# EAGLE board copy (EAGLE 4.16)
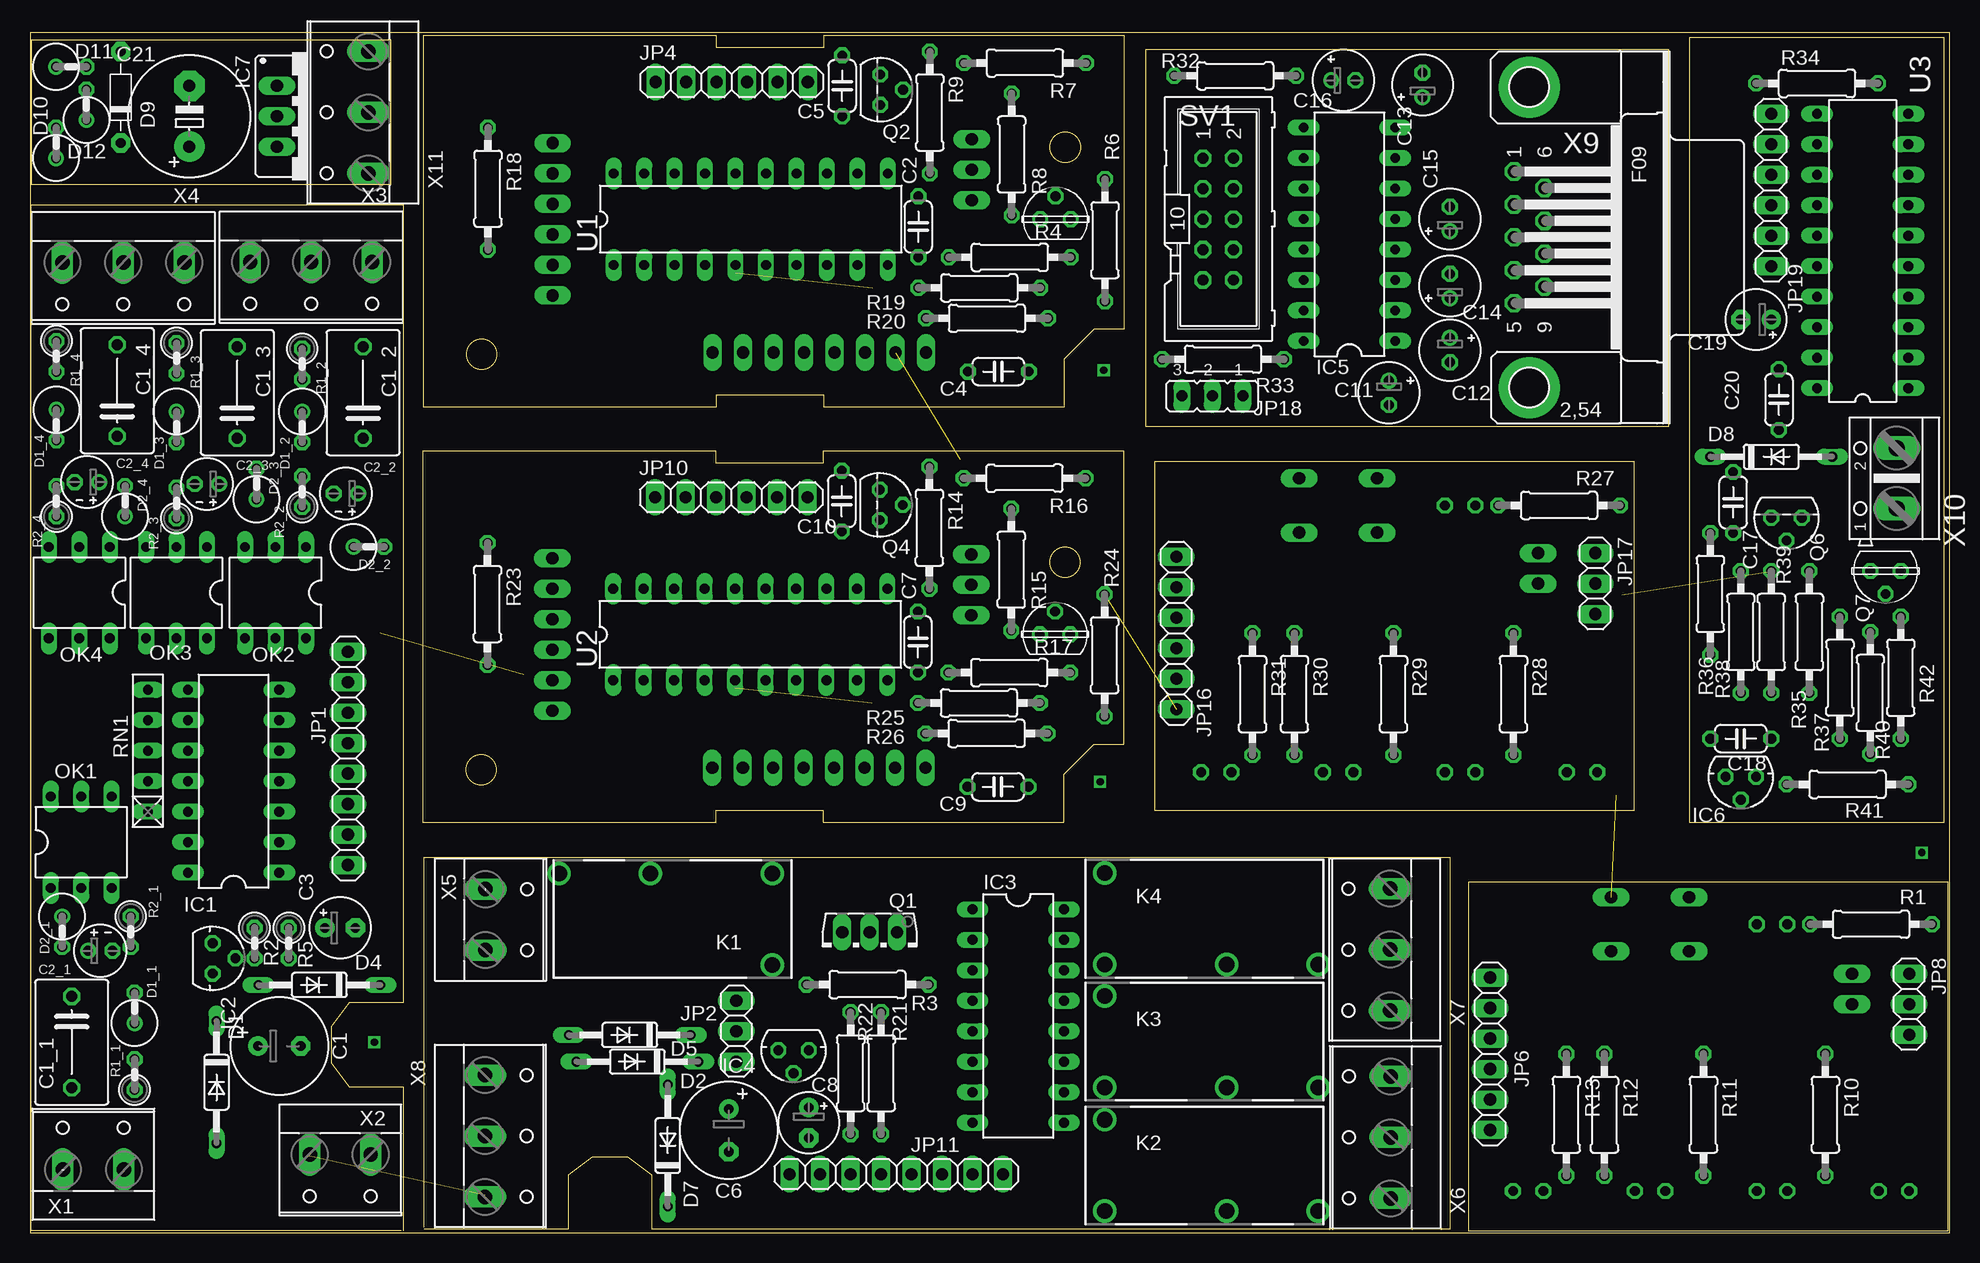
[diagram p0: board, top side]
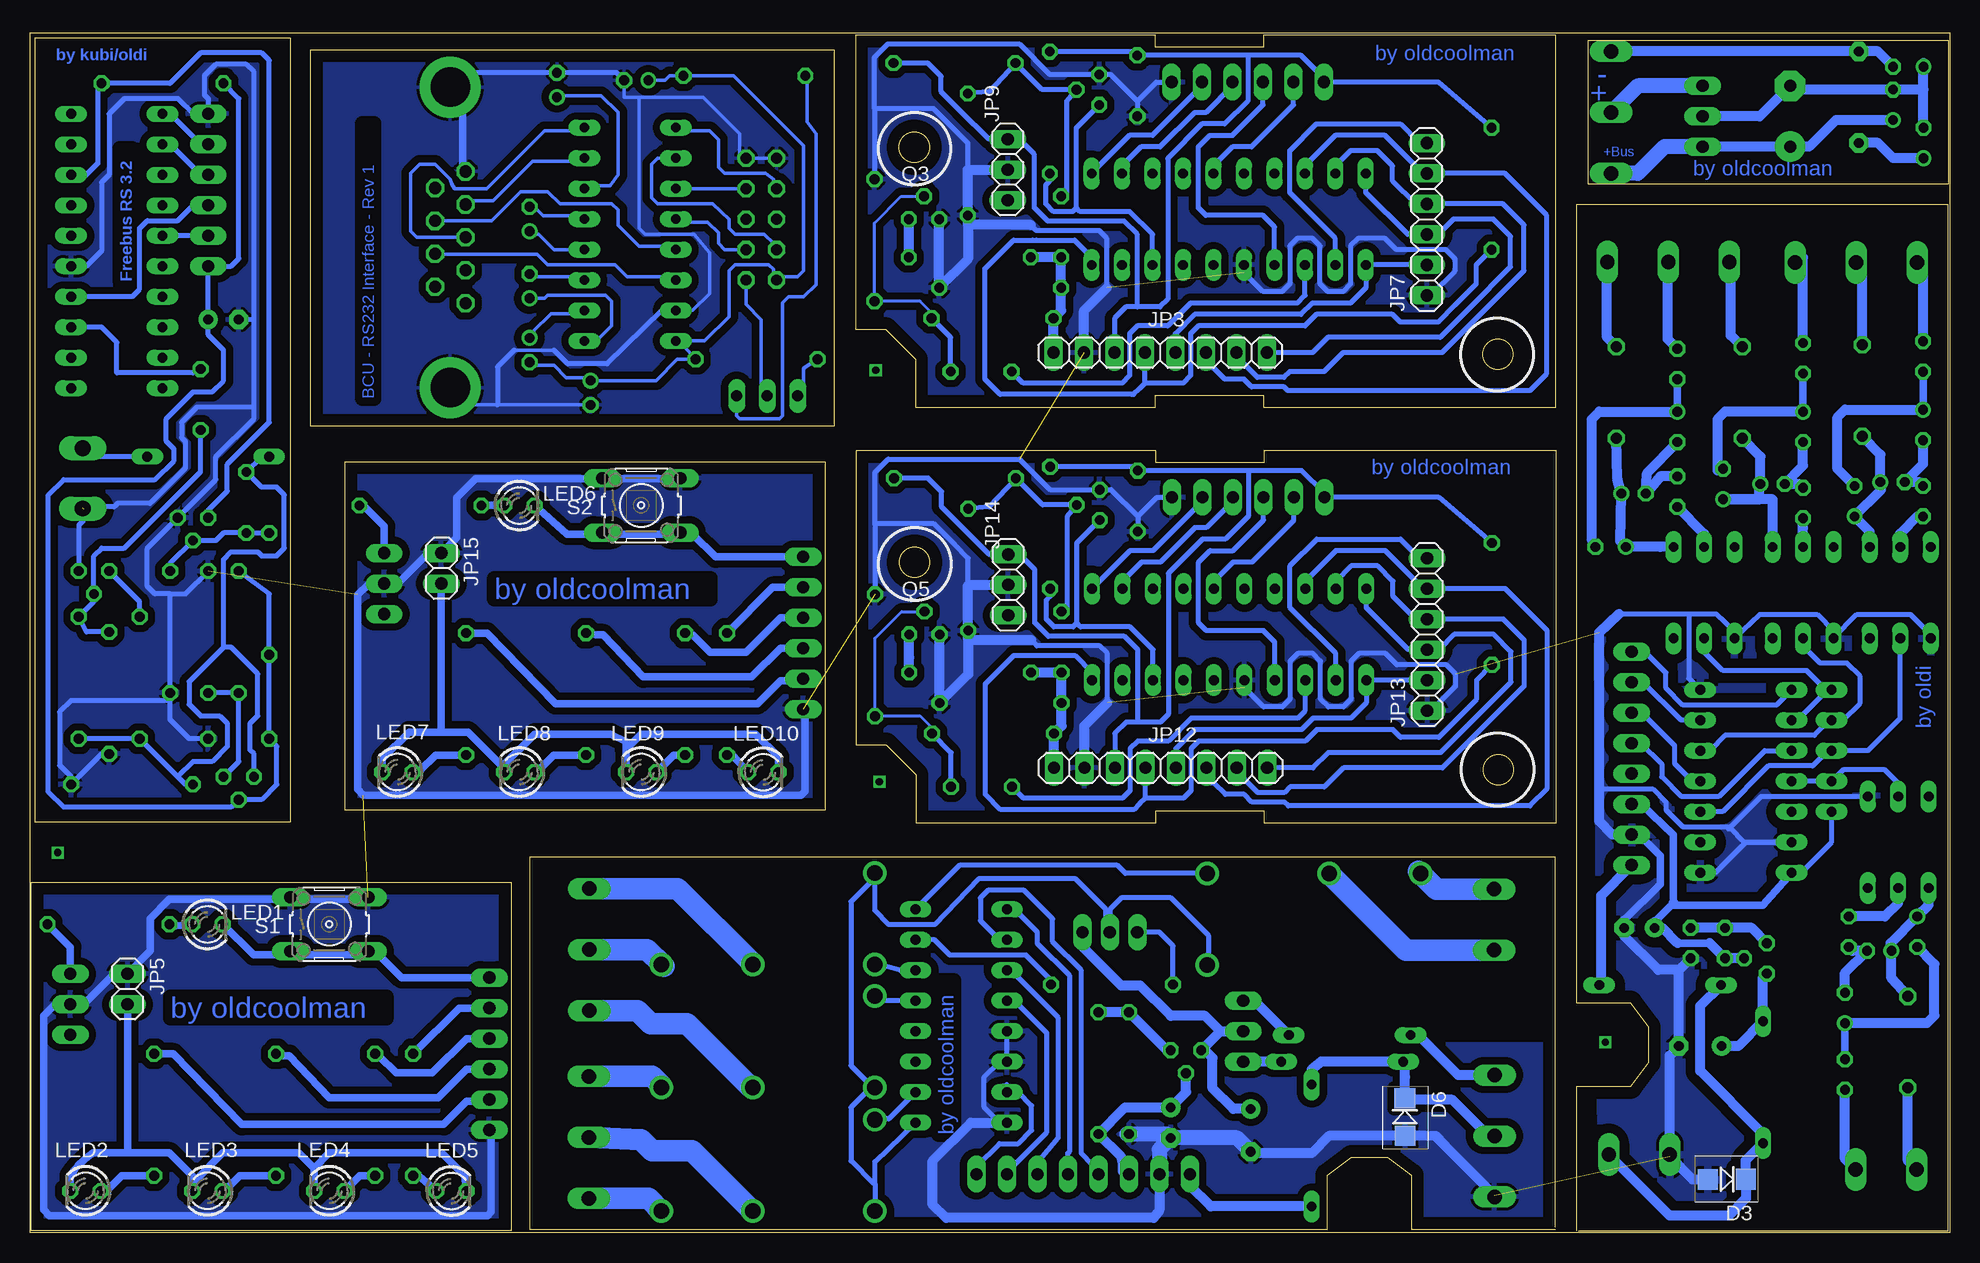
[diagram p1: board, bottom side, seen from below]

Size 160 x 100 mm. Coordinates in mm from the lower left corner, seen from the top.
Outline: 30.94,0.19 0.1,0.19 0.1,85.68 31.1,85.68 31.1,19.18 26.6,19.18 26.59,19.17 25.1,17.17 25.1,14.19 25.1,14.19 26.61,12.18 31.1,12.18 31.1,0.18
Outline: 91.18,75.3 88.68,75.3 86.18,72.8
Outline: 86.18,72.8 86.18,68.8 66.18,68.8 66.18,69.8
Outline: 66.18,69.8 57.18,69.8 57.18,68.8 32.81,68.8 32.81,99.8 57.18,99.8 57.18,98.8 66.18,98.8 66.18,99.8
Outline: 66.18,99.8 91.18,99.8 91.18,75.3
Outline: 159.9,0.18 159.9,29.22
Outline: 159.9,29.22 119.9,29.22
Outline: 119.9,29.22 119.9,0.18
Outline: 119.9,0.18 159.9,0.18
Outline: 32.85,0.46 32.85,31.3 118.35,31.3 118.35,0.3 51.85,0.3 51.85,4.8 51.84,4.81 49.83,6.3 46.85,6.3 46.85,6.3 44.84,4.79 44.84,0.3 32.85,0.3
Outline: 91.14,40.7 88.64,40.7 86.14,38.2
Outline: 86.14,38.2 86.14,34.2 66.14,34.2 66.14,35.2
Outline: 66.14,35.2 57.15,35.2 57.15,34.2 32.78,34.2 32.78,65.2 57.14,65.2 57.14,64.2 66.14,64.2 66.14,65.2
Outline: 66.14,65.2 91.15,65.2 91.15,40.7
Outline: 133.74,35.23 133.74,64.28
Outline: 133.74,64.28 93.74,64.28
Outline: 93.74,64.28 93.74,35.24
Outline: 93.74,35.24 133.74,35.24
Outline: 0,0 160,0 160,100 0,100 0,0
Outline: 93,67.22 136.61,67.22 136.61,98.58 93,98.58 93,67.22
Outline: 159.58,99.61 138.32,99.61 138.32,34.21 159.58,34.21 159.58,99.61
Outline: 30.11,99.41 0.11,99.41 0.11,87.41 30.11,87.41 30.11,99.41
Outline: circle at 86.3,90.48 radius 1.26
Outline: circle at 37.63,73.21 radius 1.26
Outline: circle at 86.26,55.88 radius 1.26
Outline: circle at 37.59,38.61 radius 1.26
Copper layers (1*16): Top 0.035mm / dielectric 1.5mm / Bottom 0.035mm
Design rules "default": minimum track width 10mil, minimum drill 24mil, track to track 8mil, track to pad 8mil, pad to pad 8mil, via to via 8mil, smd to smd 8mil, copper to edge 40mil, drill to drill 8mil, minimum pad ring 10mil, minimum via ring 8mil, stop-mask expansion 4mil, vias tented up to drill 0mil, thermal gap 10mil

## Footprints (pad centres in the part's own frame; a part is rotated, then mirrored left to right if it is on the bottom)
E3,5-8 = drill 0.813 pad 1.6 round: + -1.778,0 | drill 0.813 pad 1.6 octagon: - 1.778,0
C075-063X106 = drill 0.914 octagon: 1 -3.81,0; 2 3.81,0
C050-024X044 = drill 0.813 octagon: 1 -2.54,0; 2 2.54,0
E2-4 = drill 0.813 pad 1.27 round: + -1.016,0 | drill 0.813 pad 1.27 octagon: - 1.016,0
E2,5-5 = drill 0.813 pad 1.6 round: + -1.27,0 | drill 0.813 pad 1.6 octagon: - 1.27,0
E2-5 = drill 0.813 pad 1.27 round: + -1.016,0 | drill 0.813 pad 1.27 octagon: - 1.016,0
E5-10,5 = drill 1.016 pad 2.54 round: + -2.54,0 | drill 1.016 pad 2.54 octagon: - 2.54,0
DO35-10 = drill 0.813 long: A 5.08,0; C -5.08,0
RAD2,5 = drill 0.813 octagon: A 1.27,0 | drill 0.813 round: C -1.27,0
SMA = smd 1.67 x 1.73: 1 -1.576,0; 2 1.58,0.014
D-7,5 = drill 0.813 pad 1.6 octagon: 1 -3.81,0; 2 3.81,0
DIL14 = drill 0.813 long: 1 -7.62,-3.81; 2 -5.08,-3.81; 3 -2.54,-3.81; 4 0,-3.81; 5 2.54,-3.81; 6 5.08,-3.81; 7 7.62,-3.81; 8 7.62,3.81; 9 5.08,3.81; 10 2.54,3.81; 11 0,3.81; 12 -2.54,3.81; 13 -5.08,3.81; 14 -7.62,3.81
317L = drill 0.813 octagon: 1 -1.27,0; 2 0,1.905; 3 1.27,0
DIL16 = drill 0.813 long: 1 -8.89,-3.81; 2 -6.35,-3.81; 3 -3.81,-3.81; 4 -1.27,-3.81; 5 1.27,-3.81; 6 3.81,-3.81; 7 6.35,-3.81; 8 8.89,-3.81; 9 8.89,3.81; 10 6.35,3.81; 11 3.81,3.81; 12 1.27,3.81; 13 -1.27,3.81; 14 -3.81,3.81; 15 -6.35,3.81; 16 -8.89,3.81
78XXS = drill 1.016 long: GND 0,-2.54; IN -2.54,-2.54; OUT 2.54,-2.54
1X08 = drill 1.016 long: 1 -8.89,0; 2 -6.35,0; 3 -3.81,0; 4 -1.27,0; 5 1.27,0; 6 3.81,0; 7 6.35,0; 8 8.89,0
1X03 = drill 1.016 long: 1 -2.54,0; 2 0,0; 3 2.54,0
1X06 = drill 1.016 long: 1 -6.35,0; 2 -3.81,0; 3 -1.27,0; 4 1.27,0; 5 3.81,0; 6 6.35,0
1X02 = drill 1.016 long: 1 -1.27,0; 2 1.27,0
JP2 = drill 0.914 long: 1 -2.54,0; 2 0,0; 3 2.54,0
RE-SCHRACK = drill 1.3 round: 11 8.89,-3.81; 14 1.27,-3.81; A1 -8.89,-3.81; A2 -8.89,3.81
LED3MM = drill 0.813 octagon: A -1.27,0; K 1.27,0
DIL06 = drill 0.813 long: 1 -2.54,-3.81; 2 0,-3.81; 3 2.54,-3.81; 4 2.54,3.81; 5 0,3.81; 6 -2.54,3.81
TO126AV = drill 1.016 long: B 2.286,-1.27; C 0,-1.27; E -2.286,-1.27
TO92 = drill 0.813 octagon: 1 1.27,0; 2 0,1.905; 3 -1.27,0
TO237 = drill 0.813 octagon: 1 1.27,0; 2 0,1.905; 3 -1.27,0
0207/10 = drill 0.813 octagon: 1 -5.08,0; 2 5.08,0
0207/2V = drill 0.813 octagon: 1 -1.27,0; 2 1.27,0
RN-5 = drill 0.813 long: 1 -5.08,0; 2 -2.54,0; 3 0,0; 4 2.54,0; 5 5.08,0
B3F-10XX = drill 1.016 long: 1 -3.251,2.261; 2 3.251,2.261; 3 -3.251,-2.261; 4 3.251,-2.261
ML10 = drill 0.914 octagon: 1 -5.08,-1.27; 2 -5.08,1.27; 3 -2.54,-1.27; 4 -2.54,1.27; 5 0,-1.27; 6 0,1.27; 7 2.54,-1.27; 8 2.54,1.27; 9 5.08,-1.27; 10 5.08,1.27
DIL20 = drill 0.813 long: 1 -11.43,-3.81; 2 -8.89,-3.81; 3 -6.35,-3.81; 4 -3.81,-3.81; 5 -1.27,-3.81; 6 1.27,-3.81; 7 3.81,-3.81; 8 6.35,-3.81; 9 8.89,-3.81; 10 11.43,-3.81; 11 11.43,3.81; 12 8.89,3.81; 13 6.35,3.81; 14 3.81,3.81; 15 1.27,3.81; 16 -1.27,3.81; 17 -3.81,3.81; 18 -6.35,3.81; 19 -8.89,3.81; 20 -11.43,3.81
W237-132 = drill 1.194 long: 1 -2.54,-0.635; 2 2.54,-0.635
W237-3E = drill 1.194 long: 1 -5.08,-0.635; 2 0,-0.635; 3 5.08,-0.635
F09HP = drill 1.016 octagon: 1 -5.486,-1.27; 2 -2.743,-1.27; 3 0,-1.27; 4 2.743,-1.27; 5 5.486,-1.27; 6 -4.115,1.27; 7 -1.372,1.27; 8 1.372,1.27; 9 4.115,1.27 | drill 3.302 pad 5.08 round: G1 -12.522,0; G2 12.522,0
AK500/2 = drill 1.321 long: 1 -2.515,0; 2 2.515,0

## Placement (x,y rotation side)
C1  10µ  [E3,5-8]  20.78,15.58 0 top
C1_1  47nF  [C075-063X106]  3.48,15.9 270 top
C1_2  47nF  [C075-063X106]  27.77,70.03 90 top
C1_3  47nF  [C075-063X106]  17.29,70.03 90 top
C1_4  47nF  [C075-063X106]  7.29,70.19 90 top
C2  100n  [C050-024X044]  74.05,83.84 90 top
C2_1  [E2-4]  5.86,23.52 0 top
C2_2  [E2-4]  26.34,61.62 180 top
C2_3  [E2-4]  14.75,62.41 180 top
C2_4  [E2-4]  4.75,62.57 180 top
C3  1µ  [E2,5-5]  25.86,25.42 0 top
C4  100n  [C050-024X044]  80.72,71.78 180 top
C5  100n  [C050-024X044]  67.7,95.59 90 top
C6  10µ  [E3,5-8]  58.24,8.55 270 top
C7  100n  [C050-024X044]  74.01,49.24 90 top
C8  1µ  [E2,5-5]  64.91,9.19 270 top
C9  100n  [C050-024X044]  80.68,37.18 180 top
C10  100n  [C050-024X044]  67.66,60.99 90 top
C11  100n  [E2-5]  113.28,70.01 270 top
C12  100n  [E2-5]  118.36,73.57 270 top
C13  100n  [E2-5]  116.08,95.67 90 top
C14  100n  [E2-5]  118.36,78.9 90 top
C15  100n  [E2-5]  118.36,84.49 90 top
C16  100n  [E2-5]  109.47,96.05 0 top
C17  100n  [C050-024X044]  141.97,60.88 270 top
C18  100n  [C050-024X044]  142.6,41.19 180 top
C19  1µ  [E2,5-5]  143.87,76.11 180 top
C20  100n  [C050-024X044]  145.78,69.45 90 top
C21  470µF  [E5-10,5]  13.28,93.06 90 top
D1  1N4148  [DO35-10]  15.54,12.56 270 top
D1_1  1N4007STEHEND  [RAD2,5]  8.72,18.75 90 top
D1_2  1N4007STEHEND  [RAD2,5]  22.69,67.17 270 top
D1_3  1N4007STEHEND  [RAD2,5]  12.21,67.17 270 top
D1_4  1N4007STEHEND  [RAD2,5]  2.21,67.33 270 top
D2  1N4148  [DO35-10]  50.62,14.27 180 top
D2_1  1N4007STEHEND  [RAD2,5]  2.68,25.1 270 top
D2_2  1N4007STEHEND  [RAD2,5]  28.24,57.17 0 top
D2_3  1N4007STEHEND  [RAD2,5]  18.88,62.41 90 top
D2_4  1N4007STEHEND  [RAD2,5]  7.92,60.98 90 top
D3  [SMA]  18.56,4.47 180 bottom
D4  1N4148  [DO35-10]  24.11,20.66 180 top
D5  1N4148  [DO35-10]  49.99,16.49 180 top
D6  [SMA]  45.39,9.67 270 bottom
D7  1N4148  [DO35-10]  53.16,7.29 90 top
D8  1N4148  [DO35-10]  145.14,64.69 0 top
D9  4V7  [D-7,5]  7.57,94.64 270 top
D10  1N4004STEHEND  [RAD2,5]  2.17,90.83 90 top
D11  1N4004STEHEND  [RAD2,5]  3.44,97.19 0 top
D12  1N4007STEHEND  [RAD2,5]  4.71,94.01 90 top
IC1  74HC14N  [DIL14]  16.97,37.64 90 top
IC2  LM317T  [317L]  15.22,22.88 270 top
IC3  ULN2003AN  [DIL16]  82.38,18.08 270 top
IC4  LM317T  [317L]  63.64,15.22 180 top
IC5  MAX202CPE  [DIL16]  109.98,83.22 90 top
IC6  LM317T  [317L]  142.6,38.02 180 top
IC7  [78XXS]  23.12,93.06 270 top
JP1  [1X08]  26.5,39.55 90 top
JP2  [1X03]  58.88,16.81 270 top
JP3  [1X08]  65.79,73.36 0 bottom
JP4  [1X06]  58.49,95.91 0 top
JP5  [1X02]  151.87,20.33 270 bottom
JP6  [1X06]  121.71,14.93 90 top
JP7  [1X06]  43.57,84.48 90 bottom
JP8  [1X03]  156.63,19.06 270 top
JP9  [1X03]  78.49,88.6 270 bottom
JP10  [1X06]  58.46,61.31 0 top
JP11  [1X08]  72.21,4.9 0 top
JP12  [1X08]  65.76,38.76 0 bottom
JP13  [1X06]  43.53,49.88 90 bottom
JP14  [1X03]  78.46,54 270 bottom
JP15  [1X02]  125.71,55.39 270 bottom
JP16  [1X06]  95.55,49.99 90 top
JP17  [1X03]  130.48,54.12 270 top
JP18  [JP2]  98.55,69.76 180 top
JP19  [1X06]  145.14,86.91 90 top
K1  RE030024  [RE-SCHRACK]  52.99,26.15 180 top
K2  RE030024  [RE-SCHRACK]  98.47,5.62 0 top
K3  RE030024  [RE-SCHRACK]  98.47,15.95 0 top
K4  RE030024  [RE-SCHRACK]  98.47,26.18 0 top
LED1  rot  [LED3MM]  145.21,25.73 0 bottom
LED2  [LED3MM]  155.37,3.5 180 bottom
LED3  [LED3MM]  145.21,3.5 180 bottom
LED4  [LED3MM]  135.04,3.5 180 bottom
LED5  [LED3MM]  124.89,3.5 0 bottom
LED6  rot  [LED3MM]  119.2,60.62 0 bottom
LED7  [LED3MM]  129.37,38.4 180 bottom
LED8  [LED3MM]  119.2,38.4 180 bottom
LED9  [LED3MM]  109.05,38.4 180 bottom
LED10  [LED3MM]  98.89,38.4 0 bottom
OK1  CNY17  [DIL06]  4.27,32.57 0 top
OK2  CNY17  [DIL06]  20.46,53.36 180 top
OK3  CNY17  [DIL06]  12.21,53.36 180 top
OK4  CNY17  [DIL06]  4.11,53.36 180 top
Q1  BD138  [TO126AV]  69.99,23.8 180 top
Q2  BC557  [TO92]  70.87,95.27 270 top
Q3  2N7000  [TO237]  85.48,84.48 0 top
Q4  BC557  [TO92]  70.84,60.67 270 top
Q5  2N7000  [TO237]  85.44,49.88 0 top
Q6  BC557  [TO92]  146.41,59.6 180 top
Q7  2N7000  [TO237]  154.67,55.16 180 top
R1  1k  [0207/10]  153.46,25.73 180 top
R1_1  2k7  [0207/2V]  8.72,13.2 90 top
R1_2  2k7  [0207/2V]  22.69,72.41 270 top
R1_3  2k7  [0207/2V]  12.21,72.89 270 top
R1_4  2k7  [0207/2V]  2.21,73.05 270 top
R2  330R  [0207/2V]  18.72,24.15 270 top
R2_1  6k8  [0207/2V]  8.4,25.1 270 top
R2_2  6k8  [0207/2V]  22.69,61.77 90 top
R2_3  6k8  [0207/2V]  12.21,60.82 90 top
R2_4  6k8  [0207/2V]  2.21,60.98 90 top
R3  10k  [0207/10]  69.81,20.7 180 top
R4  68  [0207/10]  81.67,81.3 0 top
R5  560R  [0207/2V]  21.57,24.15 270 top
R6  12k  [0207/10]  89.61,82.73 270 top
R7  82k  [0207/10]  82.94,97.49 0 top
R8  47k  [0207/10]  81.83,89.87 90 top
R9  10k  [0207/10]  75,93.37 270 top
R10  470R  [0207/10]  149.65,9.85 270 top
R11  470R  [0207/10]  139.49,9.85 270 top
R12  470R  [0207/10]  131.24,9.85 270 top
R13  470R  [0207/10]  128.06,9.85 270 top
R14  10k  [0207/10]  74.97,58.77 270 top
R15  47k  [0207/10]  81.79,55.27 90 top
R16  82k  [0207/10]  82.9,62.89 0 top
R17  68  [0207/10]  81.63,46.7 0 top
R18  47k  [0207/10]  38.17,87.02 270 top
R19  100k  [0207/10]  79.13,78.76 180 top
R20  390k  [0207/10]  79.76,76.22 180 top
R21  330R  [0207/10]  70.94,13.32 270 top
R22  560R  [0207/10]  68.41,13.32 270 top
R23  47k  [0207/10]  38.14,52.42 270 top
R24  12k  [0207/10]  89.57,48.13 270 top
R25  100k  [0207/10]  79.09,44.16 180 top
R26  390k  [0207/10]  79.73,41.62 180 top
R27  1k  [0207/10]  127.46,60.62 180 top
R28  470R  [0207/10]  123.65,44.91 270 top
R29  470R  [0207/10]  113.65,44.91 270 top
R30  470R  [0207/10]  105.39,44.91 270 top
R31  470R  [0207/10]  101.9,44.91 270 top
R32  45K3  [0207/10]  100.45,96.43 180 top
R33  11k  [0207/10]  99.44,72.81 180 top
R34  10k  [0207/10]  148.95,95.8 0 top
R35  47k  [0207/10]  148.32,50.08 90 top
R36  82k  [0207/10]  140.06,53.26 270 top
R37  68  [0207/10]  150.86,46.27 90 top
R38  330R  [0207/10]  142.6,50.08 90 top
R39  560R  [0207/10]  145.14,50.08 90 top
R40  12k  [0207/10]  153.4,45 90 top
R41  100k  [0207/10]  151.49,37.38 180 top
R42  390k  [0207/10]  155.94,46.27 270 top
RN1  6k8  [RN-5]  9.83,40.18 90 top
S1  push Prog  [B3F-10XX]  135.04,25.73 0 bottom
S2  push Prog  [B3F-10XX]  109.05,60.62 0 bottom
SV1  [ML10]  99.06,84.49 270 top
U1  89LPC922  [DIL20]  60.08,84.48 0 top
U2  89LPC922  [DIL20]  60.04,49.88 0 top
U3  89LPC922  [DIL20]  152.76,81.83 90 top
X1  [W237-132]  5.29,5.92 0 top
X2  [W237-132]  25.86,5.89 180 top
X3  [W237-3E]  23.44,80.28 180 top
X4  [W237-3E]  7.78,80.23 180 top
X5  [W237-132]  38.59,26.11 270 top
X6  [W237-3E]  112.78,7.96 90 top
X7  [W237-3E]  112.74,23.62 90 top
X8  [W237-3E]  38.56,8.08 270 top
X9  [F09HP]  124.97,82.97 270 top
X10  [AK500/2]  155.6,62.88 90 top
X11  [W237-3E]  27.57,93.38 90 top

## Library data of the parts
C1 C1_1-C1_4 C2 C2_1-C2_4 C3-C21 R1 R1_1-R1_4 R2 R2_1-R2_4 R3-R42 = rcl
D1 D1_1-D1_4 D2 D2_1-D2_4 D4 D5 D7 D8 D10-D12 = diode
D3 D6 = semicon-smd-ipc
D9 = DISCRETE
IC1 = 74xx-eu
IC2 IC4 IC6 IC7 = v-reg
IC3 = uln-udn
IC5 = maxim
JP1-JP17 JP19 = pinhead
JP18 = jumper
K1-K4 = relay
LED1-LED10 = led
OK1-OK4 = optocoupler
Q1 = transistor-power
Q2 Q4 Q6 = transistor-pnp
Q3 Q5 Q7 = transistor-fet
RN1 = resistor-net
S1 S2 = switch-omron
SV1 = con-harting-ml
U1-U3 = micro-philips
X1-X8 X11 = con-wago-508
X9 = con-subd
X10 = con-ptr500

## Nets
230+_1: C1_1.1 C2_1.+ D2_1.C OK1.1
230+_2: C1_2.1 C2_2.+ D2_2.C OK2.1
230+_3: C1_3.1 C2_3.+ D2_3.C OK3.1
230+_4: C1_4.1 C2_4.+ D2_4.C OK4.1
230-_1: C2_1.- D1_1.A R2_1.2
230-_2: C2_2.- D1_2.A R2_2.2
230-_3: C2_3.- D1_3.A R2_3.2
230-_4: C2_4.- D1_4.A R2_4.2
230N_1: D1_1.C D2_1.A R1_1.2
230N_2: D1_2.C D2_2.A R1_2.2
230N_3: D1_3.C D2_3.A R1_3.2
230N_4: D1_4.C D2_4.A R1_4.2
CTS: IC5.14 X9.8
CTS_: IC5.12 SV1.8
GND2: C11.- C13.- C16.- SV1.1 SV1.2 X9.1 X9.G1 X9.G2
GND3: IC5.15
GND4: C1.- C3.- C5.1 C6.- C8.- C10.1 C18.1 C19.- D3.2 D6.2 IC1.1 IC1.7 IC1.13 IC3.5 IC3.6 IC3.8 JP1.2 JP3.2 JP4.6 JP5.1 JP6.1 JP7.1 JP8.2 JP9.2 JP10.6 JP11.2 JP12.2 JP13.1 JP14.2 JP15.1 JP16.1 JP17.2 JP19.6 OK1.4 OK2.4 OK3.4 OK4.4 Q2.3 Q3.3 Q4.3 Q5.3 Q6.3 R5.2 R6.1 R8.1 R15.1 R19.1 R22.2 R24.1 R25.1 R35.1 R39.2 R40.1 R41.1 S1.1 S1.2 S2.1 S2.2 U1.5 U2.5 U3.5 X2.2 X8.3
GND5: D9.1 D11.A X11.3
IO1: IC1.10 JP1.5
IO2: IC1.8 JP1.8
IO3: IC1.6 JP1.7
IO5: IC3.1 JP11.5
IO6: IC3.7 JP11.8
IO7: IC3.4 JP11.7
IO8: IC3.3 JP11.6
N$1: C1_1.2 X1.1
N$2: R1_1.1 X1.2
N$3: Q2.1 R9.2 U1.8
N$4: D1.A D3.1 D4.A X2.1
N$5: C1_2.2 X3.1
N$6: R1_2.1 X3.2
N$7: C1_3.2 X3.3
N$8: R1_3.1 X4.1
N$9: C1_4.2 X4.2
N$10: R1_4.1 X4.3
N$11: LED2.A R10.2
N$12: LED3.A R11.2
N$13: C2.2 Q2.2 R7.1 R8.2
N$14: C4.2 U1.3
N$15: Q3.1 R4.2
N$16: IC2.1 R2.1 R5.1
N$17: IC1.11 OK1.5 RN1.2
N$18: C2.1 JP3.1 R4.1 R19.2 R20.2
N$19: IC1.9 OK2.5 RN1.5
N$20: JP5.2 LED2.K LED3.K LED4.K LED5.K
N$21: C5.2 JP3.3 JP4.1 JP9.1 R7.2 R9.1 R18.1
N$22: JP6.6 LED1.K S1.3 S1.4
N$23: LED4.A R12.2
N$24: LED5.A R13.2
N$25: JP4.3 U1.4
N$26: JP4.2 U1.15
N$27: D5.C JP2.1
N$28: LED1.A R1.2
N$29: JP4.4 U1.12
N$30: JP4.5 U1.11
N$31: IC1.5 OK3.5 RN1.4
N$32: Q1.B R3.2
N$33: D2.C JP2.3
N$34: JP6.2 R10.1
N$35: JP6.3 R11.1
N$36: JP6.4 R12.1
N$37: IC1.3 OK4.5 RN1.3
N$38: JP6.5 R13.1
N$39: JP8.1 R1.1
N$40: D4.C JP1.1
N$41: D5.A X8.1
N$42: IC3.9 K1.A2 K2.A1 K3.A1 K4.A2 Q1.C
N$43: JP3.4 R18.2 U1.10
N$44: C4.1 Q3.2 R6.2 R20.1
N$45: K2.14 X6.2
N$46: K2.11 X6.1
N$47: D2.A D6.1 D7.A X8.2
N$48: K1.11 X5.1
N$49: K1.14 X5.2
N$50: K3.11 X6.3
N$51: K3.14 X7.1
N$52: K4.11 X7.2
N$53: K4.14 X7.3
N$54: IC3.15 R3.1
N$55: IC3.2 JP11.4
N$56: Q4.1 R14.2 U2.8
N$57: C7.2 Q4.2 R15.2 R16.1
N$58: C9.2 U2.3
N$59: Q5.1 R17.2
N$60: IC4.1 R21.1 R22.1
N$61: C7.1 JP12.1 R17.1 R25.2 R26.2
N$62: JP10.5 U2.11
N$63: JP10.3 U2.4
N$64: JP10.4 U2.12
N$65: JP10.2 U2.15
N$66: JP12.4 R23.2 U2.10
N$67: C9.1 Q5.2 R24.2 R26.1
N$68: C10.2 JP10.1 JP12.3 JP14.1 R14.1 R16.2 R23.1
N$69: D7.C JP11.1
N$70: LED6.A R27.2
N$71: JP16.6 LED6.K S2.3 S2.4
N$72: JP15.2 LED7.K LED8.K LED9.K LED10.K
N$73: JP16.2 R28.1
N$74: JP16.3 R29.1
N$75: JP16.4 R30.1
N$76: JP16.5 R31.1
N$77: JP17.1 R27.1
N$78: LED7.A R28.2
N$79: LED8.A R29.2
N$80: LED9.A R30.2
N$81: LED10.A R31.2
N$82: C14.+ IC5.1
N$83: C14.- IC5.3
N$84: C15.+ IC5.4
N$85: C15.- IC5.5
N$86: JP18.3 R33.2
N$87: JP18.1 R32.2
N$88: Q6.1 R34.2 U3.8
N$89: C17.2 Q6.2 R35.2 R36.1
N$90: C20.2 U3.3
N$91: Q7.1 R37.2
N$92: IC6.1 R38.1 R39.1
N$93: C17.1 D8.C IC6.3 R37.1 R41.2 R42.2
N$94: C20.1 Q7.2 R40.2 R42.1
N$95: D8.A
N$96: C21.+ D12.C IC7.OUT X11.1
N$97: C21.- D10.A D11.C D12.A IC7.GND
N$98: D9.2 D10.C
N$99: IC7.IN X11.2
OPT_1: OK1.2 R2_1.1
OPT_2: OK2.2 R2_2.1
OPT_3: OK3.2 R2_3.1
OPT_4: OK4.2 R2_4.1
P0.0: JP3.5 JP7.2 U1.1
P0.1: JP3.8 JP7.3 U1.20
P0.2: JP3.7 JP7.4 U1.19
P0.3: JP3.6 JP7.5 U1.18
P0.4: JP12.5 JP13.2 U2.1
P0.5: JP12.8 JP13.3 U2.20
P0.6: JP12.7 JP13.4 U2.19
P0.7: JP12.6 JP13.5 U2.18
PGM: JP7.6 U1.2
PGM1: JP13.6 U2.2
R1: IC3.16 K1.A1
R2: IC3.10 K2.A2
R3: IC3.13 K3.A2
R4: IC3.14 K4.A1
RST: JP19.3 U3.4
RTS: IC5.13 X9.7
RTS_: IC5.11 SV1.4
RXD: IC5.7 X9.2
RXD1: JP19.5 U3.11
RXD_: IC5.9 SV1.3
S$7: IC1.4 JP1.6
TXD: IC5.8 X9.3
TXD1: JP19.4 U3.12
TXD_: IC5.10 SV1.7
TYPE: JP18.2 SV1.10
V+: C12.+ IC5.2
V-: C13.+ IC5.6
VCC: C11.+ C12.- C16.+ IC5.16 R32.1 R33.1 SV1.9
VCC1: C18.2 C19.+ IC6.2 JP19.1 R34.1 R36.2 R38.2
VCCMC: JP19.2 U3.15
VDD: C3.+ IC1.14 IC2.2 JP1.3 R2.2 RN1.1
VDD1: C8.+ IC4.2 JP11.3 R21.2
VDD_IN: C1.+ D1.C IC2.3
VDD_IN1: C6.+ IC4.3 JP2.2 Q1.E

## Tracks (layer width: path | path; a pad name or v marks a point on that pad's centre or on a via)
230+_1
  Bottom 0.813: OK1.1 1.73,27.33 D2_1.C 4.91,24.15 4.91,23.52 C2_1.+ 4.84,21.23 C1_1.1
230+_2
  Bottom 0.813: OK2.1 24.11,57.17 D2_2.C 27.45,57.65 C2_2.+ 27.67,62.79 C1_2.1
230+_3
  Bottom 0.813: OK3.1 14.75,61.14 D2_3.C 15.86,61.14 15.86,61.77 C2_3.+ 15.77,64.7 C1_3.1
230+_4
  Bottom 0.813: OK4.1 6.65,58.44 D2_4.C 5.7,61.93 5.7,62.57 C2_4.+ 5.76,64.86 C1_4.1
230-_1
  Bottom 0.813: C2_1.- 6.81,23.52 | R2_1.2 8.08,23.52 C2_1.- | C2_1.- 8.72,21.68 D1_1.A
230-_2
  Bottom 0.813: C2_2.- 25.23,61.62 | R2_2.2 24.11,63.05 C2_2.- | C2_2.- 25.23,63.3 D1_2.A
230-_3
  Bottom 0.813: C2_3.- 13.8,62.41 | R2_3.2 12.53,62.41 C2_3.- | C2_3.- 12.21,63.93 D1_3.A
230-_4
  Bottom 0.813: C2_4.- 3.79,62.57 | R2_4.2 2.52,62.57 C2_4.- | C2_4.- 2.21,64.09 D1_4.A
230N_1
  Bottom 0.61: D1_1.C R1_1.2
  Bottom 0.813: D1_1.C 1.89,17.48 1.25,18.12 1.25,22.41 D2_1.A
230N_2
  Bottom 0.61: D1_2.C R1_2.2
  Bottom 0.813: D1_2.C 29.2,68.44 29.83,67.81 29.83,57.81 D2_2.A
230N_3
  Bottom 0.61: D1_3.C R1_3.2
  Bottom 0.813: D1_3.C 18.72,68.44 19.35,67.81 19.35,63.52 D2_3.A
230N_4
  Bottom 0.61: D1_4.C R1_4.2
  Bottom 0.813: D1_4.C 8.72,68.6 9.35,67.97 9.35,63.68 D2_4.A
CTS
  Bottom 0.305: IC5.14 107.44,79.67 110.23,79.67 111.25,80.68 116.84,80.68 117.73,81.57 125.85,81.57 X9.8
CTS_
  Bottom 0.305: IC5.12 104.9,84.24 103.5,84.24 102.61,83.35 102.61,82.46 102.11,81.95 SV1.8
GND2
  Bottom 0.305: C11.- 121.03,69 122.93,69 X9.G2 | SV1.1 SV1.2 100.83,89.83 100.83,91.6 103.88,94.65 109.22,94.65 | 109.22,94.65 110.49,94.65 C16.- | 105.28,76.87 104.77,76.87 103.38,78.27 103.38,81.7 104.64,83.22 108.71,83.22 109.22,83.73 109.22,94.65 | 116.33,73.57 119.63,73.57
  Bottom 0.406: C16.- 111.12,96.68 C13.- 123.69,96.68 124.97,95.41 X9.G1 | 105.28,76.87 107.31,76.87 111.88,72.43 115.19,72.43 116.33,73.57 | 119.63,73.57 121.03,72.17 121.03,69
  Bottom 0.61: X9.1 123.95,89.06 123.95,93.13 X9.G1
  pour Bottom (isolate 0.61): 93.34,98.21 93.6,97.95 136.14,97.95 136.27,97.83 136.27,67.6 93.47,67.6
GND4  (9 unrouted)
  Bottom 0.406: U3.5 155.3,80.56 154.03,81.83 154.03,87.55 153.4,88.18 153.4,93.26 152.13,94.53 147.68,94.53 146.41,93.26 JP19.6 145.14,94.53 145.46,94.85 145.46,96.44 144.51,97.39 141.97,97.39 141.33,96.75 141.33,76.11 | 149.91,60.88 147.05,63.73 147.05,65.95 147.37,66.27 147.37,67.54 146.09,68.81 141.33,68.81 | 141.33,76.11 C19.- | 141.33,68.81 141.33,76.11 | 141.33,68.81 141.33,67.86 144.51,64.69 144.51,62.78 Q6.3 150.22,57.06 150.22,53.89 149.59,53.26 148.32,53.26 | R40.1 154.03,39.92 R41.1 156.57,38.02 157.53,38.97 157.53,43.41 156.57,44.37 148.32,44.37 | R39.2 147.05,53.26 148.32,53.26 | 148.32,53.26 R35.1 148.32,44.37 | 148.32,44.37 148.32,42.78 146.73,41.19 C18.1 | 67.7,94.32 69.92,96.54 Q2.3 75,96.54 77.54,99.08 88.5,99.08 89.61,97.97 89.61,93.69 | R6.1 89.61,93.84 89.61,93.69 | 89.61,93.69 84.69,93.69 82.94,91.94 81.83,90.83 R8.1 | U1.5 58.81,80.03 57.22,78.44 55.63,78.44 55,79.08 55,82.25 54.36,82.89 53.09,82.89 52.46,82.25 52.46,79.08 51.82,78.44 50.55,78.44 49.92,79.08 49.92,82.25 49.28,82.89 47.06,82.89 46.11,81.94 41.98,81.94 41.19,81.14 41.19,80.19 43.25,78.13 JP7.1 | 67.7,94.32 C5.1 | 67.7,94.32 66.11,95.91 JP4.6 | 70.24,78.76 70.24,82.89 70.87,83.53 76.11,83.53 76.59,84 | IC1.1 19.51,30.02 16.97,32.56 13,32.56 IC1.13 17.13,32.56 18.32,33.76 | 18.32,33.76 18.4,33.84 22.21,33.84 23.64,35.26 23.64,35.9 24.75,37.01 29.2,37.01 | OK1.4 | OK1.4 15.7,36.38 18.4,33.68 | 18.32,33.76 18.4,33.68 | 18.4,33.68 | 27.52,51.6 21.73,51.6 | 21.73,51.6 19.45,51.6 17.92,50.19 OK2.4 15.82,51.56 11.04,51.56 9.67,50.19 OK3.4 7.72,51.56 3.26,51.56 1.57,49.87 OK4.4 | IC1.7 21.73,46.22 21.73,51.6
  Bottom 0.406: 138.38,27.79 138.33,27.79 S1.1 | 131.83,27.79 S1.2 | 138.38,27.79 | JP5.1 | JP13.1 42.58,44.16 41.15,45.59 41.15,46.54 41.95,47.34 46.07,47.34 47.03,48.29 49.25,48.29 49.88,47.66 49.88,44.48 50.52,43.84 51.79,43.84 52.42,44.48 52.42,47.66 53.06,48.29 54.33,48.29 54.96,47.66 54.96,44.48 55.6,43.84 57.19,43.84 58.77,45.43 U2.5 | JP10.6 66.08,61.31 67.66,59.72 | 67.66,59.72 C10.1 | 67.66,59.72 69.89,61.94 Q4.3 74.97,61.94 77.51,64.48 88.46,64.48 89.57,63.37 89.57,59.09 | R24.1 89.57,59.24 89.57,59.09 | 89.57,59.09 84.65,59.09 82.9,57.34 81.79,56.23 R15.1 | 76.55,49.4 76.08,48.92 70.84,48.92 70.2,48.29 70.2,44.16 | IC3.5 IC3.6 79.2,14.27 80.47,13 80.47,10.46 79.2,9.19 | 56.34,6.65 C6.- | S2.1 112.18,62.85 112.22,62.85 | 105.67,62.85 S2.2 | 150,60.8 152.7,60.8 153,60.5 155,60.5 | 155,60.5 155.5,60.5 155.5,60.3 155,60.3 155,60.5 | 155,60.5 154.9,60.5 154.9,60.7 | 156,55.2 155.9,55.2 155.9,59 155.6,59.3 155.6,60.4 | JP15.1
  Bottom 0.61: 27.13,26.06 24.11,29.07 24.11,31.45 25.86,33.2 JP1.2 | JP6.1 121.55,7.79 121.55,1.75 121.87,1.44 158.38,1.44 158.86,1.91 158.86,18.11 157.91,19.06 JP8.2 155.52,19.06 152.98,21.6 JP5.1 | 138.33,27.79 131.83,27.79 | 138.38,27.79 148.38,27.79 149.97,26.2 149.97,23.5 JP5.1 | JP16.1 95.39,42.84 95.39,36.81 95.71,36.49 132.22,36.49 132.7,36.97 132.7,53.16 131.75,54.12 JP17.2 129.37,54.12 126.83,56.66 JP15.1 124.44,57.93 124.44,61.26 122.86,62.85 112.22,62.85 | 112.18,62.85 105.67,62.85
  Bottom 0.813: Q3.3 84.21,84 84.21,79.4 R19.1 81.83,81.14 81.83,84 | 81.83,84 R8.1 81.83,88.61 JP9.2 | JP3.2 72.14,76.86 70.24,78.76 | 76.59,84 81.83,84 | D3.2 21.4,4.45 23.32,6.37 X2.2 23.32,14.79 22.53,15.58 C1.- 22.56,21.9 22.53,21.93 | R5.2 | R5.2 | 22.53,21.93 R5.2 | JP1.2 28.08,33.2 29.2,34.31 29.2,37.01 29.2,50.03 27.52,51.6 | 22.53,21.93 24.27,21.93 27.13,24.79 C3.- 27.13,26.06 | JP1.2 | Q5.3 | Q5.3 84.17,49.4 84.17,44.8 R25.1 81.79,46.54 81.79,49.4 | JP14.2 81.79,54.01 R15.1 81.79,49.4 | 76.55,49.4 81.79,49.4 | 70.2,44.16 72.11,42.26 JP12.2 | IC3.8 79.2,9.19 81.58,9.19 84.76,6.01 84.76,2.36 83.64,1.25 66.34,1.25 65.86,1.89 JP11.2 | 57.93,6.65 56.34,6.65 53.16,6.65 51.73,8.09 D6.2 43.8,8.1 42.85,8.08 42.05,7.29 | 42.05,7.29 42.85,8.09 | 42.05,7.29 37.92,3.16 X8.3
  Bottom 1.27: 68.56,8.24 R22.2 65.23,8.24 C8.- | JP11.2 | JP11.2 65.86,6.97 C8.- | C8.- 59.39,7.92 C6.-
  pour Bottom (isolate 0.813): 16.5,0.81 13.96,3.35 13.96,35.58 13.64,36.53 1.1,36.53 1.1,49.55 29.04,49.39 29.35,49.08 29.04,0.82
  pour Bottom (isolate 0.61): 33.2,64.8 90.6,64.8 90.6,34.2 33,34.2
  pour Bottom (isolate 0.61): 119.9,29.2 159.7,29.2 159.7,0.9 120.3,0.9
  pour Bottom (isolate 0.61): 93.9,64.4 133.5,64.4 133.5,35.6 93.9,35.6 93.9,36 93.8,36 93.8,62.8
  pour Bottom (isolate 0.61): 33,99.5 90.9,99.5 90.9,69.1 32.8,69.1 32.8,99.6
  pour Bottom (isolate 0.61): 33.9,15.7 61.1,15.7 61.1,16 59.9,16 59.9,30.5 91.8,30.5 91.8,30.2 91.3,30.2 91.3,0.9 33.9,0.9
  pour Bottom (isolate 0.61): 138.6,99.2 138.6,34.6 159.5,34.6 159.2,34.6 159.2,99.4 138.8,99.4 138.8,99.2
GND5
  Bottom 0.813: D11.A 5.98,98.45 D9.1 X11.3
IO1
  Bottom 0.406: JP1.5 25.72,40.82 24,39.1 24,38 22.4,36.4 19.2,36.4 15.4,40.2 13.2,40.2 13.19,40.19 IC1.10
IO2
  Bottom 0.406: IC1.8 14.43,43.99 22.21,43.99 23.64,45.42 23.64,46.69 25.39,48.44 JP1.8 | JP1.8
IO3
  Bottom 0.406: JP1.7 26.34,45.9 25.54,45.9 22.37,42.73 IC1.6 | IC1.6
IO5
  Bottom 0.406: IC3.1 77.93,26.97 76.03,25.07 76.03,24.11 73.33,21.41 73.33,6.81 73.48,6.65 JP11.5
IO6
  Bottom 0.406: 79.2,11.73 77.61,11.73 76.5,10.62 76.5,8.55 77.61,7.44 79.2,7.44 81.11,5.54 JP11.8 | 78.88,12.05 78.56,12.37
  Bottom 0.813: IC3.7 78.88,12.05 79.2,11.73
IO7
  Bottom 0.406: IC3.4 77.93,19.35 75.23,16.65 75.23,8.4 78.56,5.06 JP11.7
IO8
  Bottom 0.406: IC3.3 78.25,21.89 74.28,17.92 74.28,7.92 76.03,5.86 JP11.6
N$1
  Bottom 0.813: X1.1 3.48,6.01 C1_1.2
N$2
  Bottom 0.813: X1.2 8.72,6.17 R1_1.1
N$3
  Bottom 0.406: U1.8 66.43,83.21 68.33,85.11 72.46,85.11 72.78,85.43 | R9.2 75,87.65 75.32,87.33 75.32,85.75 74.68,85.11 73.1,85.11 72.78,85.43 | 72.78,85.43 72.78,92.1 Q2.1
N$4
  Bottom 0.813: X2.1 23.32,1.45 18.4,1.45 16.97,2.88 D3.1 | D3.1 | D3.1 16.98,6.04 D1.A | D1.A | D1.A 15.54,8.28 20.78,13.52 20.78,18.91 D4.A | D4.A
N$5
  Bottom 0.406: 28.56,81.43 arc-90 X3.1
  Bottom 0.813: 28.56,81.43 28.56,81.46 | 28.56,81.43 X3.1 | C1_2.2 28.56,74.63 28.56,81.43
N$6
  Bottom 0.406: 23.48,81.35 arc90 X3.2
  Bottom 0.813: X3.2 23.48,81.35 23.48,74.47 R1_2.1
N$7
  Bottom 0.406: 18.24,81.46 18.29,81.46 arc-90 X3.3
  Bottom 0.813: 18.24,81.46 18.24,74.79 C1_3.2
N$8
  Bottom 0.813: X4.1 12.86,81.3 12.21,81.3 R1_3.1
N$9
  Bottom 0.406: 7.92,81.3 7.78,81.3 X4.2
  Bottom 0.813: C1_4.2 7.29,81.3 7.78,81.3
N$10
  Bottom 0.406: 2.7,81.3 X4.3
  Bottom 0.813: R1_4.1 2.21,81.3 2.7,81.3
N$11
  Bottom 0.61: LED2.A 153.62,3.5 152.35,4.77 R10.2
N$12
  Bottom 0.61: LED3.A 143.78,3.5 142.51,4.77 R11.2
N$13
  Bottom 0.406: C2.2 73.57,86.7 73.57,94.32 Q2.2 75.64,95.27 R7.1 80.08,95.11 R8.2
N$14
  Bottom 0.406: C4.2 77.22,70.83 68.97,70.83 68.33,71.46 68.33,74.95 67.7,75.59 65.16,75.59 63.25,77.49 54.36,77.49 53.73,78.13 U1.3
N$15
  Bottom 0.813: Q3.1 86.75,82.57 R4.2
N$16
  Bottom 0.813: IC2.1 16.5,25.42 R2.1 | R5.1 21.73,25.42 | R5.1 | R2.1 | R2.1 R5.1
N$17
  Bottom 0.406: RN1.2 | IC1.11 | RN1.2 IC1.11 | RN1.2 8.88,38.6 5.38,38.6 4.27,37.49 OK1.5 | OK1.5
N$18
  Bottom 0.813: R4.1 C2.1 R19.2 74.05,76.86 R20.2 JP3.1
N$19
  Bottom 0.406: IC1.9 12.69,42.73 10.14,45.27 | RN1.5 | RN1.5 | IC1.9 | OK2.5 20.46,48.44 18.88,46.85 11.89,46.85 10.3,45.27 10.14,45.27 | RN1.5 | RN1.5 | RN1.5 10.14,45.27
N$20
  Bottom 0.61: LED5.K 123.77,4.77 125.68,6.67 135.04,6.67 136.31,5.41 | 136.31,5.41 LED4.K | LED3.K 146.32,4.29 146.16,4.45 | 146.16,4.45 143.94,6.67 137.59,6.67 136.31,5.41 | 136.31,5.41 | LED2.K 156.63,4.77 arc23 154.73,6.67 151.87,6.67 | 151.87,6.67 148.38,6.67 146.16,4.45 | 151.87,6.67 JP5.2
N$21
  Bottom 0.406: R18.1 42.62,95.91 JP4.1 52.14,96.22 54.05,98.13 58.49,98.13 | 67.7,77.17 68.65,77.17 69.6,76.22 JP3.3 | 58.49,98.13 C5.2 68.02,98.45 R9.1 | 58.49,98.13 58.49,94.32 60.4,92.42 62.3,92.42 65.16,89.56 65.16,77.81 65.79,77.17 67.7,77.17 | R7.2 85.16,97.5 84.05,96.38 84.05,95.11 82.46,93.53 80.08,91.14 JP9.1 77.54,91.14 76.27,89.88 76.27,85.43 75.16,84.32 68.81,84.32 67.7,83.21 67.7,77.17
N$22
  Bottom 0.406: 138.38,23.18 138.38,23.22 S1.3 138.18,23.18 | 131.87,23.18 131.87,23.34 131.83,23.34 S1.4 131.87,23.23 131.87,23.18 | 130.92,23.18 131.87,23.18
  Bottom 0.61: LED1.K 141.37,23.18 138.38,23.18 | 131.87,23.18 138.18,23.18 | JP6.6 129.01,21.28 130.92,23.18
N$23
  Bottom 0.61: R12.2 132.5,4.77 LED4.A
N$24
  Bottom 0.61: 126.31,3.5 LED5.A 127.58,4.77 R13.2
N$25
  Bottom 0.406: JP4.3 57.22,94 59.76,91.46 61.67,91.46 62.62,90.51 62.62,85.43 61.98,84.8 57.22,84.8 56.27,83.84 U1.4
N$26
  Bottom 0.406: U1.15 61.35,88.92 59.76,90.51 58.17,90.51 54.68,94 JP4.2
N$27
  Bottom 0.813: D5.C 57.93,19.35 JP2.1
N$28
  Bottom 0.61: 148.22,25.57 148.2,25.59 R1.2 | LED1.A 148.22,25.57 | 148.22,25.57
N$29
  Bottom 0.406: U1.12 68.97,88.92 67.38,90.51 65.79,90.51 62.94,93.37 61.98,93.37 59.76,95.59 JP4.4
N$30
  Bottom 0.406: U1.11 68.33,91.46 66.43,91.46 62.3,95.59 JP4.5
N$31
  Bottom 0.406: IC1.5 19.99,40.19 18.72,41.45 11.26,41.45 9.99,42.73 | 9.99,42.73 | 9.99,42.73 RN1.4 8.88,42.73 7.45,44.15 7.45,46.38 8.56,47.49 10.78,47.49 12.21,48.92 OK3.5
N$32
  Bottom 0.406: R3.2 64.73,23.93 65.86,25.07 Q1.B 67.77,25.07
N$33
  Bottom 0.813: D2.C JP2.3
N$34
  Bottom 0.406: JP6.2 121.87,10.96 | 149.81,14.93 R10.1
  Bottom 0.61: 121.87,10.96 123.61,10.96 125.52,9.06 142.35,9.06 148.06,14.93 149.81,14.93
N$35
  Bottom 0.406: 139.01,14.77 R11.1
  Bottom 0.61: JP6.3 123.61,13.66 126,11.28 135.04,11.28 138.38,14.77 139.01,14.77
N$36
  Bottom 0.406: 130.92,14.77 R12.1
  Bottom 0.61: JP6.4 123.61,16.2 126.47,13.34 129.49,13.34 130.92,14.77 131.39,14.93
N$37
  Bottom 0.406: RN1.3 10.14,40.19 11.41,38.91 15.09,38.91 18.9,35.1 20.7,35.1 IC1.3 | RN1.3 | RN1.3 6.81,40.19 4.11,42.88 OK4.5
N$38
  Bottom 0.61: JP6.5 124.25,18.74 R13.1
N$39
  Bottom 0.61: R1.1 158.36,25.59 158.38,25.57 156.63,23.82 JP8.1
N$40
  Bottom 0.406: JP1.1
  Bottom 0.813: D4.C 29.04,20.82 29.04,28.12 26.66,30.5 26.66,30.66 JP1.1 | JP1.1
N$41
  Bottom 0.813: X8.1 40.94,13.16 44.27,16.49 D5.A
N$42
  Bottom 0.406: 89.58,4.11 K2.A1 | 89.58,4.11 89.58,5.95 IC3.9 | 89.58,4.11 89.68,4.11 91.58,6.01 91.58,10.46 89.91,12.14 K3.A1 89.68,12.05 91.58,13.95 91.58,27.61 89.58,29.61 | 89.58,29.61 K4.A2 | 89.58,29.61 89.58,26.87 88.41,25.7 84.6,25.7 80.95,29.51 72.85,29.51 70.31,26.97 70.31,25.38 Q1.C 69.99,26.97 69.04,27.92 64.91,27.92 61.74,24.75 61.74,22.48 K1.A2
N$43
  Bottom 0.406: 38.01,81.94 R18.2 39.44,80.67 39.44,79.08 41.19,77.33 | 41.19,77.33 | 41.19,77.33 42.62,75.91 45.79,75.91 46.43,76.54 52.78,76.54 53.73,75.59 62.62,75.59 63.25,74.95 63.25,71.46 63.89,70.83 67.06,70.83 | 67.06,70.83 JP3.4 | 67.06,70.83 67.54,70.35 68.02,69.87 68.17,69.87 79.13,69.87 80.4,71.14 80.4,80.35 78.02,82.73 76.43,82.73 76.11,82.73 72.94,82.73 71.51,81.3 U1.10
N$44
  Bottom 0.254: R20.1 84.84,76.7 85.8,77.65 R6.2 89.61,84.16 87.38,86.38 Q3.2
  Bottom 0.406: R20.1 83.26,74.64 C4.1
N$45
  Bottom 1.778: K2.14 99.77,1.81 104.8,6.85 108.13,6.85 109.05,7.76 X6.2
N$46
  Bottom 1.778: K2.11 107.39,1.81 108.45,2.88 X6.1
N$47
  Bottom 0.813: X8.2 38.4,8.08 41.42,11.1 45.55,11.1 D6.1 45.39,13 45.39,13.95 arc-90 D2.A 52.37,14.27 53.16,13.63 D7.A
N$48
  Bottom 1.778: K1.11 44.27,30.14 | K1.11 | X5.1 42.78,28.65 K1.11
N$49
  Bottom 1.778: K1.14 45.32,23.57 X5.2
N$50
  Bottom 1.778: K3.11 107.36,12.27 108.13,13.04 X6.3
N$51
  Bottom 1.778: K3.14 99.93,12.14 105.22,17.43 108.25,17.45 109.34,18.54 X7.1
N$52
  Bottom 1.778: 107.31,22.37 107.14,22.21 | K4.11 107.31,22.37 | X7.2 108.55,23.62 107.31,22.37
N$53
  Bottom 1.778: K4.14 99.74,22.43 106.01,28.7 X7.3
N$54
  Bottom 0.406: 74.75,20.62 74.83,20.7 R3.1 74.51,20.7 76.98,23.16 83.33,23.16 84.6,24.43 IC3.15
N$55
  Bottom 0.406: IC3.2 79.2,24.43 80.79,26.02 80.79,27.92 80.15,28.56 77.14,28.56 74.75,26.18 74.75,24.27 72.37,21.89 72.37,6.65 71.42,5.7 JP11.4
N$56
  Bottom 0.406: U2.8 66.39,48.61 68.3,50.51 72.43,50.51 72.74,50.83 | R14.2 74.97,53.05 75.28,52.73 75.28,51.15 74.65,50.51 73.06,50.51 72.74,50.83 | 72.74,50.83 72.74,57.5 Q4.1
N$57
  Bottom 0.406: C7.2 73.54,52.1 73.54,59.72 Q4.2 75.6,60.67 R16.1 80.05,60.51 R15.2
N$58
  Bottom 0.406: C9.2 77.19,36.23 68.93,36.23 68.3,36.86 68.3,40.35 67.66,40.99 65.12,40.99 63.22,42.89 54.33,42.89 53.69,43.53 U2.3
N$59
  Bottom 0.813: Q5.1 86.71,47.97 R17.2
N$60
  Bottom 0.813: IC4.1 65.23,15.22 R22.1 R21.1
N$61
  Bottom 0.813: R17.1 C7.1 R25.2 74.01,42.26 R26.2 JP12.1
N$62
  Bottom 0.406: U2.11 68.3,56.86 66.39,56.86 62.27,60.99 JP10.5
N$63
  Bottom 0.406: JP10.3 57.19,59.4 59.73,56.86 61.63,56.86 62.58,55.91 62.58,50.83 61.95,50.2 57.19,50.2 56.23,49.24 U2.4
N$64
  Bottom 0.406: U2.12 68.93,54.32 67.35,55.91 65.76,55.91 62.9,58.77 61.95,58.77 59.73,60.99 JP10.4
N$65
  Bottom 0.406: U2.15 61.31,54.32 59.73,55.91 58.14,55.91 54.65,59.4 JP10.2
N$66
  Bottom 0.406: 37.98,47.34 R23.2 39.41,46.07 39.41,44.48 41.15,42.73 | 41.15,42.73 | 41.15,42.73 42.58,41.3 45.76,41.3 46.39,41.94 52.74,41.94 53.69,40.99 62.58,40.99 63.22,40.35 63.22,36.86 63.85,36.23 67.03,36.23 | 67.03,36.23 JP12.4 | 67.03,36.23 67.5,35.75 67.98,35.27 68.14,35.27 79.09,35.27 80.36,36.54 80.36,45.75 77.98,48.13 76.39,48.13 76.08,48.13 72.9,48.13 71.47,46.7 U2.10
N$67
  Bottom 0.254: R26.1 84.81,42.1 85.76,43.05 R24.2 89.57,49.56 87.35,51.78 Q5.2
  Bottom 0.406: R26.1 83.22,40.03 C9.1
N$68
  Bottom 0.406: R23.1 42.58,61.31 JP10.1 52.11,61.62 54.01,63.53 58.46,63.53 | 67.66,42.58 68.62,42.58 69.57,41.62 JP12.3 | 58.46,63.53 C10.2 67.98,63.85 R14.1 | 58.46,63.53 58.46,59.72 60.36,57.81 62.27,57.81 65.12,54.96 65.12,43.21 65.76,42.58 67.66,42.58 | R16.2 85.13,62.9 84.02,61.78 84.02,60.51 82.43,58.93 80.05,56.55 JP14.1 77.51,56.55 76.24,55.27 76.24,50.83 75.12,49.72 68.78,49.72 67.66,48.61 67.66,42.58
N$69
  Bottom 0.813: D7.C 61.58,2.21 63.33,3.95 JP11.1 | JP11.1
N$70
  Bottom 0.61: 122.06,60.63 122.04,60.65 R27.2 | LED6.A 122.06,60.63 | 122.06,60.63 122.06,60.62
N$71
  Bottom 0.406: 112.22,58.24 112.22,58.28 S2.3 112.02,58.24 | 105.71,58.24 105.71,58.4 105.67,58.4 S2.4 105.71,58.29 105.71,58.24 | 104.76,58.24 105.71,58.24
  Bottom 0.61: LED6.K 115.22,58.24 112.22,58.24 | 105.71,58.24 112.02,58.24 | JP16.6 102.85,56.34 104.76,58.24
N$72
  Bottom 0.61: LED10.K 97.61,39.67 99.52,41.58 109.05,41.58 110.31,40.3 | 110.31,40.3 LED9.K | LED8.K 120.16,39.35 120.63,38.88 | 120.63,38.88 117.94,41.58 111.58,41.58 110.31,40.94 110.31,40.3 | LED7.K 130.63,39.51 128.41,41.73 125.71,41.73 | 125.71,41.73 123.49,41.73 120.63,38.88 | 125.71,41.73 JP15.2
N$73
  Bottom 0.406: JP16.2 95.71,46.02 | R28.1
  Bottom 0.61: 95.71,46.02 97.46,46.02 99.36,44.12 116.19,44.12 121.9,49.99 R28.1
N$74
  Bottom 0.406: 112.86,49.83 R29.1
  Bottom 0.61: JP16.3 97.46,48.72 99.84,46.34 108.89,46.34 112.22,49.83 112.86,49.83
N$75
  Bottom 0.406: 104.76,49.83 R30.1
  Bottom 0.61: JP16.4 97.46,51.26 100.31,48.4 103.33,48.4 104.76,49.83 105.23,49.99
N$76
  Bottom 0.61: JP16.5 98.09,53.8 R31.1
N$77
  Bottom 0.61: R27.1 132.2,60.65 132.22,60.62 130.48,58.88 JP17.1
N$78
  Bottom 0.61: LED7.A 127.46,38.56 126.19,39.83 R28.2
N$79
  Bottom 0.61: LED8.A 117.62,38.56 116.35,39.83 R29.2
N$80
  Bottom 0.61: R30.2 106.35,39.83 LED9.A
N$81
  Bottom 0.61: 100.16,38.56 LED10.A 101.42,39.83 R31.2
N$82
  Bottom 0.305: IC5.1 112.52,74.59 111.5,75.6 111.5,77.63 112.01,78.14 116.84,78.14 117.09,77.89 C14.+
N$83
  Bottom 0.305: IC5.3 115.06,79.67 118.11,79.67 C14.-
N$84
  Bottom 0.305: IC5.4 116.33,81.95 117.6,83.22 117.85,83.22 C15.+
N$85
  Bottom 0.305: IC5.5 115.06,84.75 117.22,84.75 117.85,85.38 C15.-
N$86
  Bottom 0.305: R33.2 95.5,72.05 95.5,70.78 JP18.3
N$87
  Bottom 0.305: R32.2 95.25,96.43 95.25,92.62 94.48,91.6 94.48,79.03 95.5,78.02 96.77,78.02 97.28,77.51 97.28,68.11 97.53,67.86 100.83,67.86 101.09,68.11 JP18.1
N$88
  Bottom 0.406: U3.8 155.3,88.18 154.35,89.13 154.35,95.48 R34.2 148.32,95.8 145.78,98.34 140.7,98.34 140.06,97.7 140.06,67.54 143.56,64.05 143.56,61.83 145.14,60.24 Q6.1
N$89
  Bottom 0.406: R36.1 C17.2 143.87,58.34 144.51,57.7 Q6.2 148.32,55.8 R35.2
N$90
  Bottom 0.406: U3.3 154.03,75.48 152.76,74.21 152.76,71.67 146.41,71.67 C20.2
N$91
  Bottom 0.406: R37.2 150.86,52.62 Q7.1
N$92
  Bottom 0.406: R39.1 R38.1 142.6,39.28 IC6.1
N$93
  Bottom 0.406: 147.68,38.02 R37.1 R42.2 | 147.68,38.02 147.05,37.38 R41.2 | D8.C 140.7,64.69 C17.1 140.7,62.15 139.43,62.15 138.79,61.51 138.79,57.06 139.43,56.43 140.7,56.43 141.01,56.75 143.24,56.75 143.87,56.11 143.87,48.81 | 143.87,48.81 146.73,45.95 146.73,44.05 145.78,43.09 144.19,43.09 143.56,42.46 143.56,40.55 144.82,39.28 146.41,39.28 147.68,38.02 | 143.87,48.81 143.24,48.81 141.01,46.59 141.01,43.09 141.65,42.46 141.65,40.24 141.33,39.92 IC6.3
N$94
  Bottom 0.406: C20.1 145.78,63.41 152.13,57.06 154.03,57.06 154.67,56.43 Q7.2 154.67,52.62 R42.1 155.3,50.08 R40.2
N$95
  Bottom 0.406: D8.A 154.03,64.69
N$96
  Bottom 0.813: IC7.OUT C21.+ 11.69,90.52 9.47,92.74 D12.C
  Bottom 1.27: X11.1 25.98,88.3 23.76,90.52 IC7.OUT
N$97
  Bottom 0.813: IC7.GND 15.82,93.06 C21.- 12.64,95.6 12.33,95.28 D12.A 2.17,95.28 | 2.17,97.5 D11.C 2.17,95.28 | D10.A 2.17,95.28
N$98
  Bottom 0.813: D9.2 5.98,90.83 4.71,89.56 D10.C
N$99
  Bottom 1.27: IC7.IN 25.98,95.6 X11.2
OPT_1
  Bottom 0.813: OK1.2 arc90 4.11,28.6 arc-90 4.27,28.44 4.27,27.48 5.38,26.37 R2_1.1
OPT_2
  Bottom 0.813: OK2.2 20.46,58.28 R2_2.1 | R2_2.1
OPT_3
  Bottom 0.813: OK3.2 12.21,58.28 12.21,58.76 R2_3.1
OPT_4
  Bottom 0.813: OK4.2 4.11,58.28 2.68,59.71 R2_4.1
P0.0
  Bottom 0.406: JP7.2 U1.1 48.65,78.76 49.92,77.49 53.09,77.49 54.05,76.54 62.94,76.54 64.52,74.95 JP3.5
P0.1
  Bottom 0.406: U1.20 48.65,86.7 45.16,83.21 JP7.3 42.62,83.21 41.35,84.48 38.01,84.48 36.58,83.05 36.58,80.51 40.08,77.02 42.46,74.64 51.82,74.64 53.09,73.36 JP3.8
P0.2
  Bottom 0.406: JP3.7 59.44,73.05 57.7,71.3 55.48,71.3 55,71.78 52.14,71.78 50.55,73.36 42.3,73.36 38.97,76.7 35.47,80.19 35.47,84 37.22,85.75 JP7.4 44.52,85.75 46.43,87.65 46.43,88.92 47.7,90.19 49.92,90.19 51.19,88.92 U1.19
P0.3
  Bottom 0.406: U1.18 53.73,88.92 51.19,91.46 47.06,91.46 43.89,88.29 JP7.5 37.06,88.29 33.57,84.8 33.57,79.24 33.57,71.62 35,70.19 55.16,70.19 55.48,70.51 58.17,70.51 58.81,71.14 60.4,71.14 61.35,72.09 61.98,72.09 JP3.6
P0.4
  Bottom 0.406: JP13.2 U2.1 48.61,44.16 49.88,42.89 53.06,42.89 54.01,41.94 62.9,41.94 64.49,40.35 JP12.5
P0.5
  Bottom 0.406: U2.20 48.61,52.1 45.12,48.61 JP13.3 42.58,48.61 41.31,49.88 37.98,49.88 36.55,48.45 36.55,45.91 40.04,42.42 42.42,40.03 51.79,40.03 53.06,38.77 JP12.8
P0.6
  Bottom 0.406: JP12.7 59.41,38.45 57.66,36.7 55.44,36.7 54.96,37.18 52.11,37.18 50.52,38.77 42.26,38.77 38.93,42.1 | 38.93,42.1 | 38.93,42.1 35.44,45.59 35.44,49.4 37.18,51.15 JP13.4 44.49,51.15 46.39,53.05 46.39,54.32 47.66,55.59 49.88,55.59 51.15,54.32 U2.19
P0.7
  Bottom 0.406: U2.18 53.69,54.32 51.15,56.86 47.03,56.86 43.85,53.69 JP13.5 37.02,53.69 33.53,50.2 33.53,44.64 33.53,37.02 34.96,35.59 55.12,35.59 55.44,35.91 58.14,35.91 58.77,36.54 60.36,36.54 61.31,37.49 61.95,37.49 JP12.6
PGM
  Bottom 0.406: JP7.6 44.2,90.83 45.79,92.42 52.78,92.42 55,90.19 55,86.7 51.19,82.89 U1.2
PGM1
  Bottom 0.406: JP13.6 44.17,56.23 45.76,57.81 52.74,57.81 54.96,55.59 54.96,52.1 51.15,48.29 U2.2
R1
  Bottom 0.406: K1.A1 68.7,29.96 69.36,30.62 82.53,30.62 IC3.16
R2
  Bottom 0.406: K2.A2 89.61,9.44 89.68,9.51 88.41,9.51 IC3.10
R3
  Bottom 0.406: 89.58,19.89 89.68,19.98 | 89.58,19.89 K3.A2 | IC3.13 88.88,19.35 89.58,19.89
R4
  Bottom 0.406: IC3.14 87.45,21.89 88.72,22.21 89.36,22.21 89.58,22.43 | 89.58,22.43 89.68,22.52 | 89.58,22.43 K4.A1
RST
  Bottom 0.406: JP19.3 146.41,85.64 147.68,84.37 150.22,84.37 150.86,83.73 150.86,78.66 151.49,78.02 U3.4
RTS
  Bottom 0.305: IC5.13 107.44,82.21 109.22,82.21 111,83.98 111,85.25 111.5,85.76 115.82,85.76 116.84,86.78 119.12,86.78 121.54,84.36 125.85,84.36 X9.7
RTS_
  Bottom 0.305: SV1.4 IC5.11
RXD
  Bottom 0.305: IC5.7 115.06,89.32 118.11,89.32 121.41,86.02 123.19,86.02 X9.2
RXD1
  Bottom 0.406: U3.11 148.32,93.26 145.78,90.72 JP19.5
RXD_
  Bottom 0.305: IC5.9 104.9,91.86 103.38,91.86 102.61,91.1 102.61,88.81 102.11,88.3 98.68,88.3 98.04,87.79 98.04,87.54 SV1.3
S$1  (via drill 0.6)
  other vias: 28.7,15.9
S$2
  Bottom 0.406: 155.3,60.88 155.94,60.24
S$3
  Bottom 0.406: 154.1,64.7 155.5,64.7 155.5,65.4
S$4  (via drill 0.6)
  other vias: 89.5,71.9
S$5  (via drill 0.6)
  other vias: 157.7,31.7
S$6  (via drill 0.6)
  other vias: 89.2,37.6
S$7  (1 unrouted)
  Bottom 0.406: IC1.4 21.45,37.65 22.9,39.1 22.9,40.6 25.7,43.4 26.6,43.4 26.56,43.36 JP1.6
TXD
  Bottom 0.305: IC5.8 115.06,91.86 117.09,91.86 121.92,87.03 124.58,87.03 124.84,87.41 124.97,87.79 126.23,89.06 127.5,89.06 128.27,88.3 128.27,83.48 127.76,82.97 X9.3
TXD1
  Bottom 0.406: U3.12 148.32,90.72 145.78,88.18 JP19.4
TXD_
  Bottom 0.305: IC5.10 107.69,89.57 108.2,89.06 108.2,86.27 107.69,85.76 103.12,85.76 101.72,84.49 101.72,83.73 101.22,83.22 98.8,83.22 98.04,82.46 SV1.7
TYPE
  Bottom 0.305: JP18.2 99.06,70.78 99.06,76.11 100.33,77.38 SV1.10
V+
  Bottom 0.305: IC5.2 115.06,76.62 116.58,76.62 118.11,75.09 C12.+
V-
  Bottom 0.305: IC5.6 112.52,87.29 111.63,87.29 111,88.17 111,93.38 112.39,94.78 115.82,94.78 C13.+
VCC
  Bottom 0.305: C16.+ 107.06,96.05 106.68,96.43 R32.1 101.34,96.43 95.5,90.59 95.5,80.17 96.01,79.67 97.28,79.67 SV1.9 98.04,79.92 98.04,80.3 98.42,80.68 101.22,80.68 101.72,80.17 101.72,76.36 103.76,74.33 IC5.16 105.53,73.95 R33.1 106.04,72.81 107.82,71.03 C11.+ 113.79,71.28 115.31,71.28 116.33,72.3 117.85,72.3 C12.- 118.87,72.81
VCC1
  Bottom 0.406: R34.1 142.6,94.53 142.6,81.19 143.24,80.56 JP19.1 C19.+ 145.14,74.84 143.87,73.58 143.87,71.03 144.82,70.08 146.41,70.08 148.63,67.86 148.63,65.95 148,65.32 148,64.37 149.59,62.78 157.21,62.78 158.48,61.51 158.48,36.74 157.21,35.48 143.24,35.48 IC6.2 140.7,36.11 139.43,37.38 139.43,40.55 C18.2 R36.2 140.06,53.26 R38.2
VCCMC
  Bottom 0.406: JP19.2 U3.15
VDD
  Bottom 0.406: RN1.1 9.83,32.56 12.37,30.02 13,30.02 IC1.14
  Bottom 0.61: 19.99,24.15 22.69,24.15 | 24.59,25.9 23,27.48 23,27.33 | 23,27.33 23,33.2 25.7,35.74 JP1.3 | IC1.14 15.54,27.33 23,27.33
  Bottom 0.813: IC2.2 R2.2 | 22.69,24.15 23.96,25.42 C3.+ 24.59,25.9 | R2.2 | R2.2 19.99,24.15 | 23,27.48 | JP1.3
VDD1
  Bottom 0.813: IC4.2 63.64,11.73 C8.+ 68.72,10.46 R21.2 69.04,6.33 68.88,5.86 68.88,5.06 JP11.3
VDD_IN
  Bottom 0.813: D1.C | C1.+ 17.61,15.58 D1.C | D1.C 15.54,21.29 IC2.3
VDD_IN1
  Bottom 0.813: 60.78,16.81 JP2.2 | 60.78,16.81 IC4.3 62.05,15.22 61.42,14.59 61.42,12.05 59.71,10.33 C6.+ | Q1.E 72.22,25 72.22,23.8 69.04,20.62 67.45,20.62 64.91,18.08 62.05,18.08 60.78,16.81

## Text on the board
Bottom: - | by oldcoolman | by kubi/oldi | + | +Bus | by oldcoolman | Freebus RS 3.2 | BCU - RS232 Interface - Rev 1 | by oldcoolman | by oldcoolman | by oldi | by oldcoolman | by oldcoolman
tValues: GND | RXD | TXD | RST | VCC_MC | VCC